# Altium PCB plp-cd_3a.PcbDoc
Units mm, origin at the board's own origin, x right, y up, seen from the top; angles counter-clockwise.
Board outline 34 x 22 mm, 4 copper layers (Top Layer, Signal Layer 1, Signal Layer 2, Bottom Layer), stack 0.789 mm thick; 30 components, 27 nets, 124 pads, 46 vias.
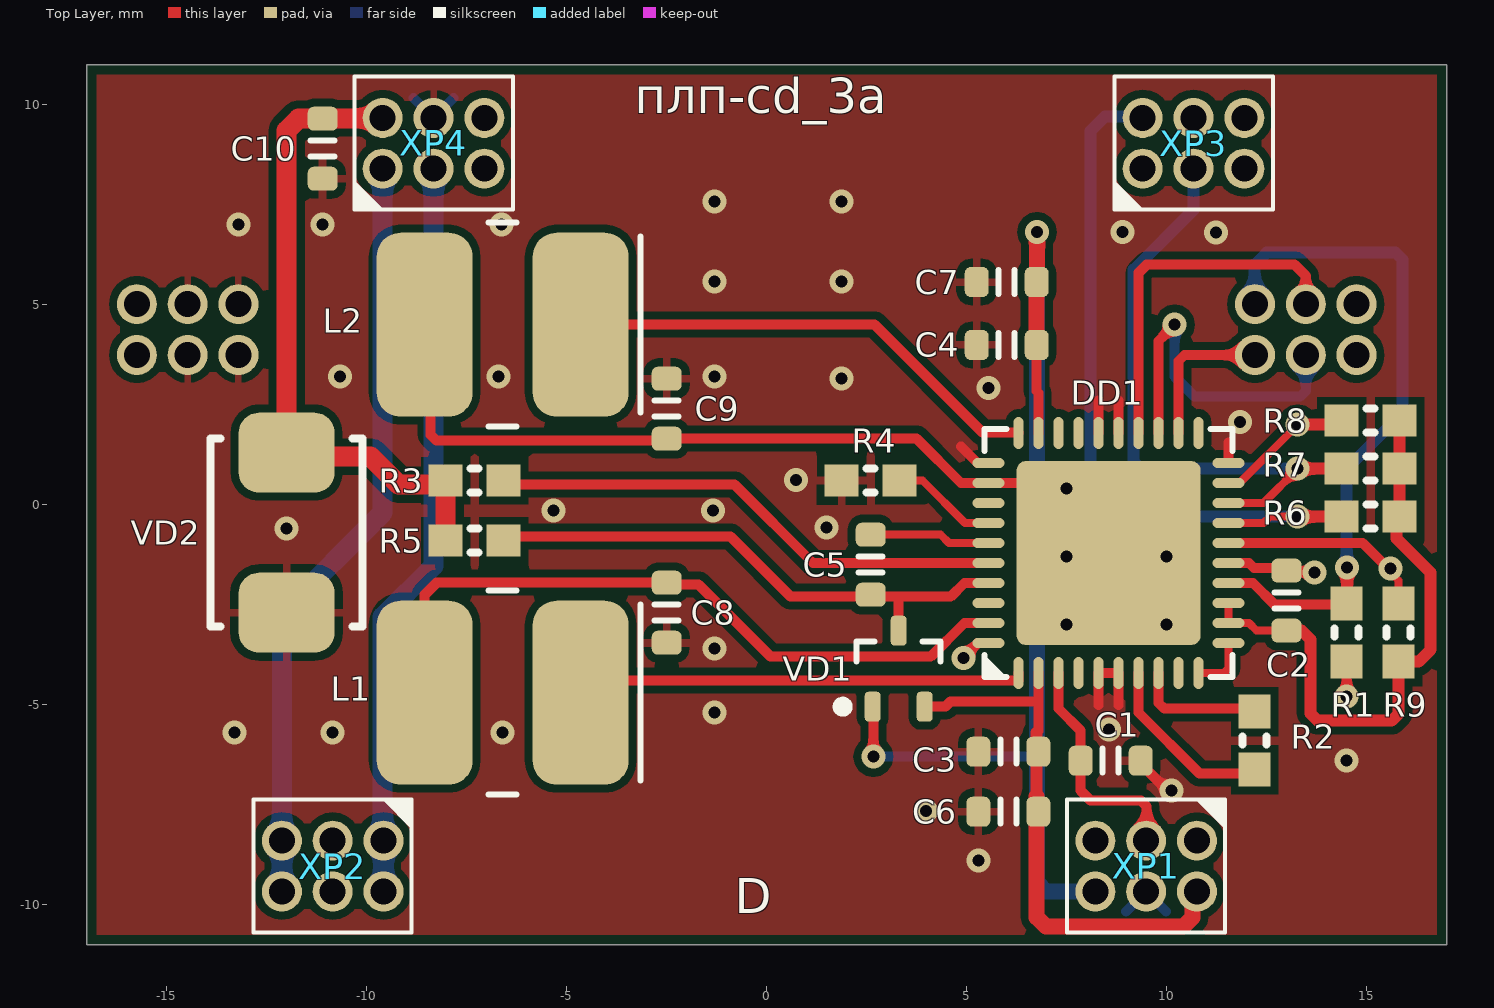
[diagram p0: Top Layer view]
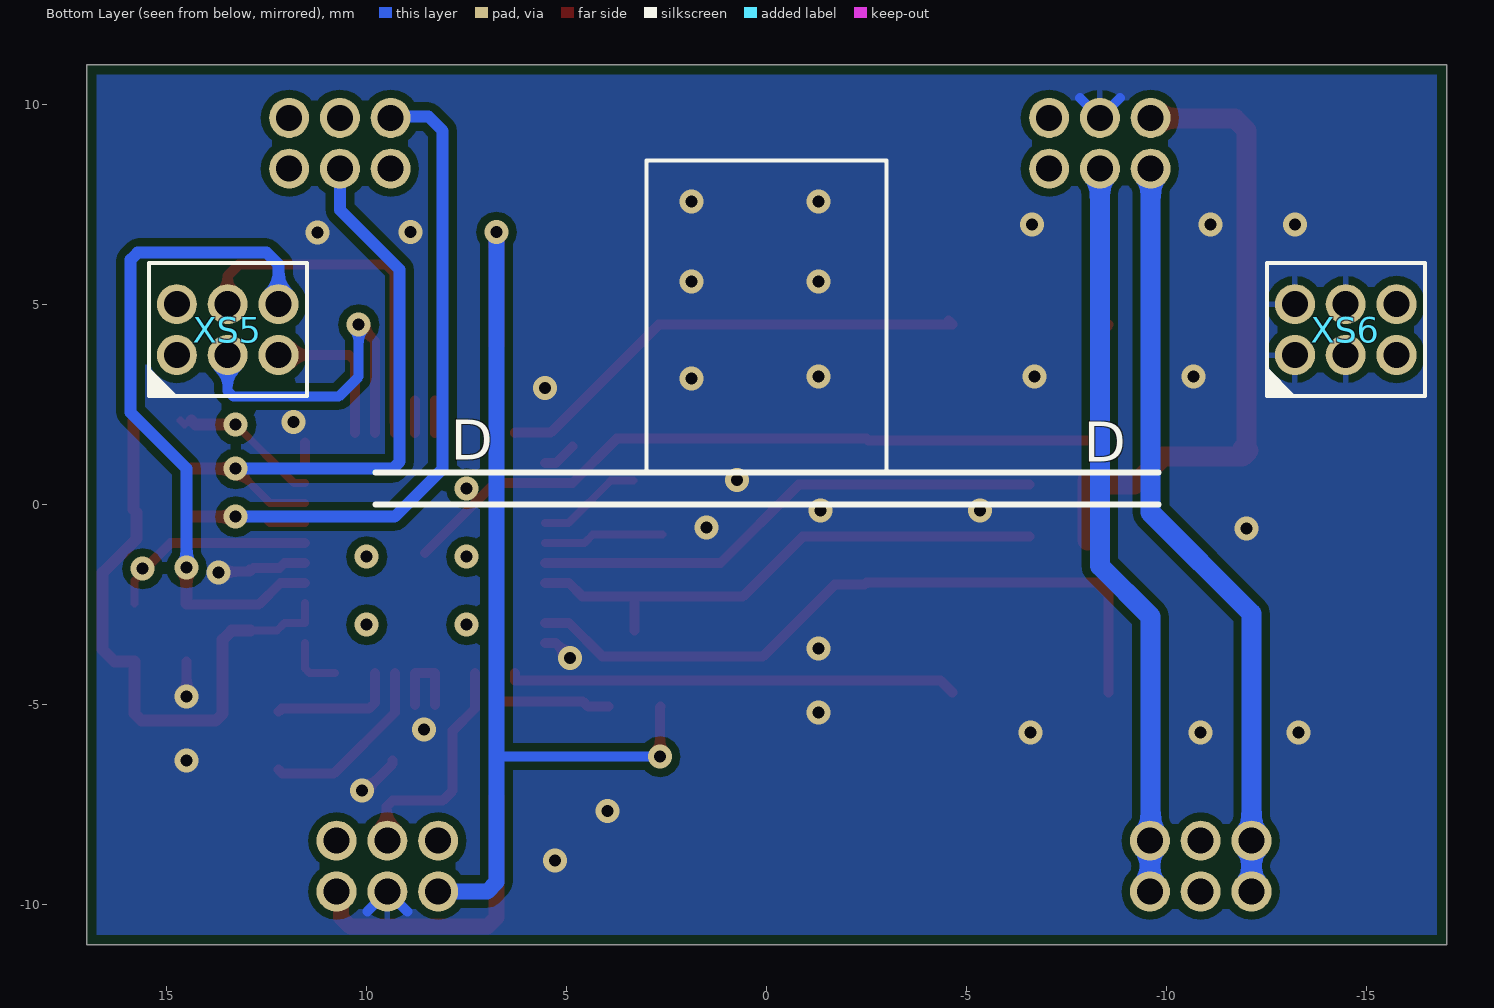
[diagram p1: Bottom Layer view, seen from below]
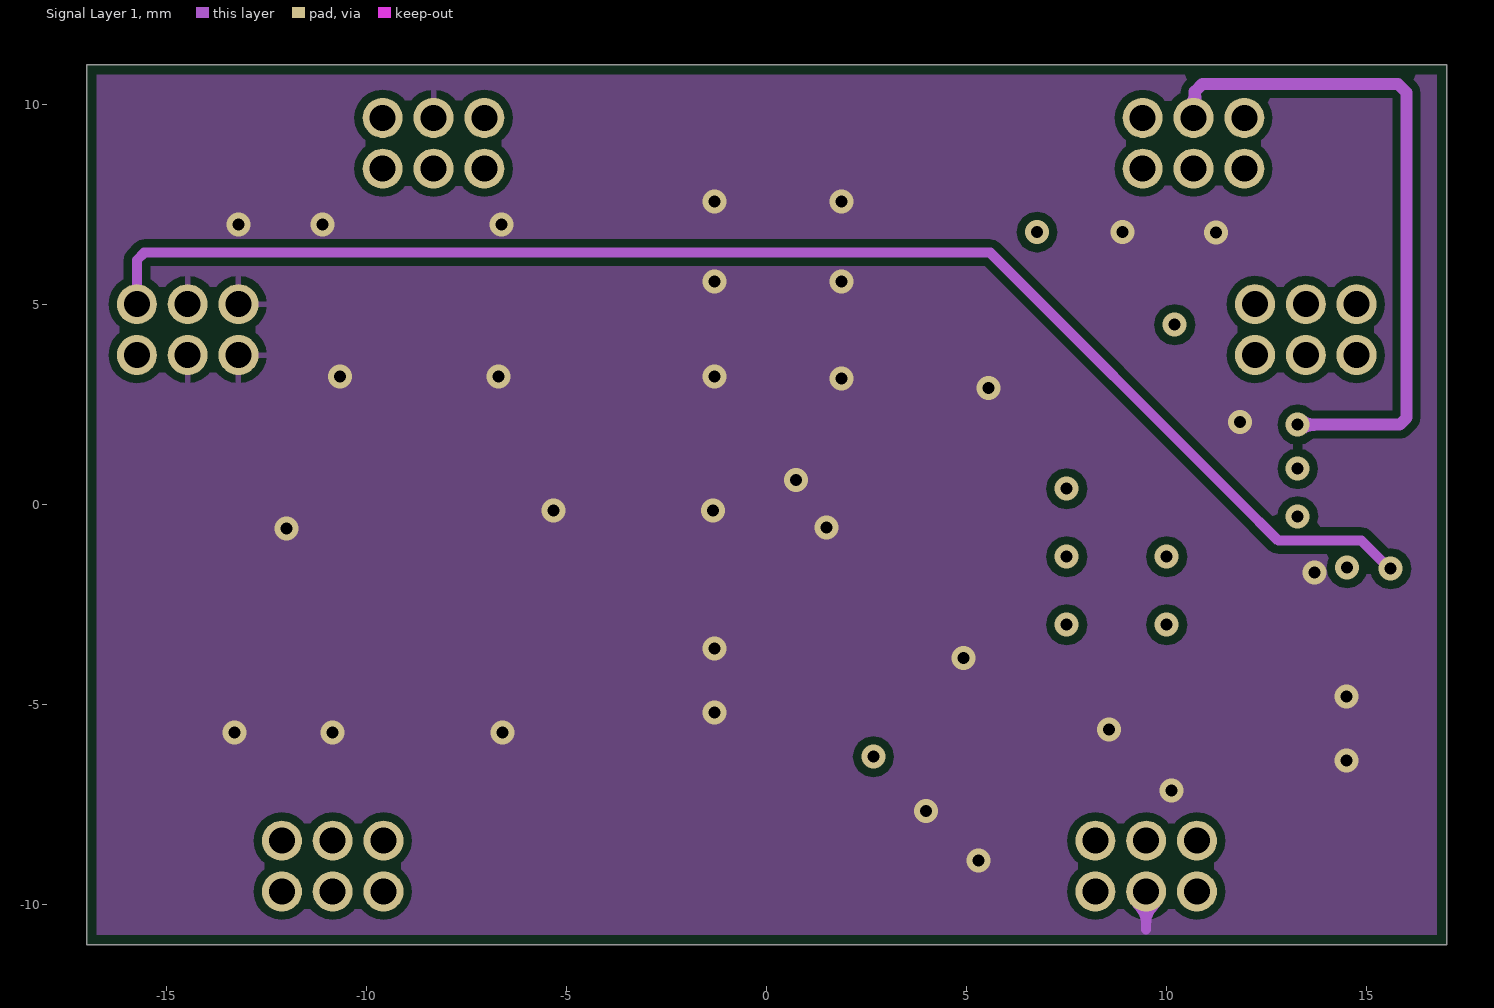
[diagram p2: Signal Layer 1]
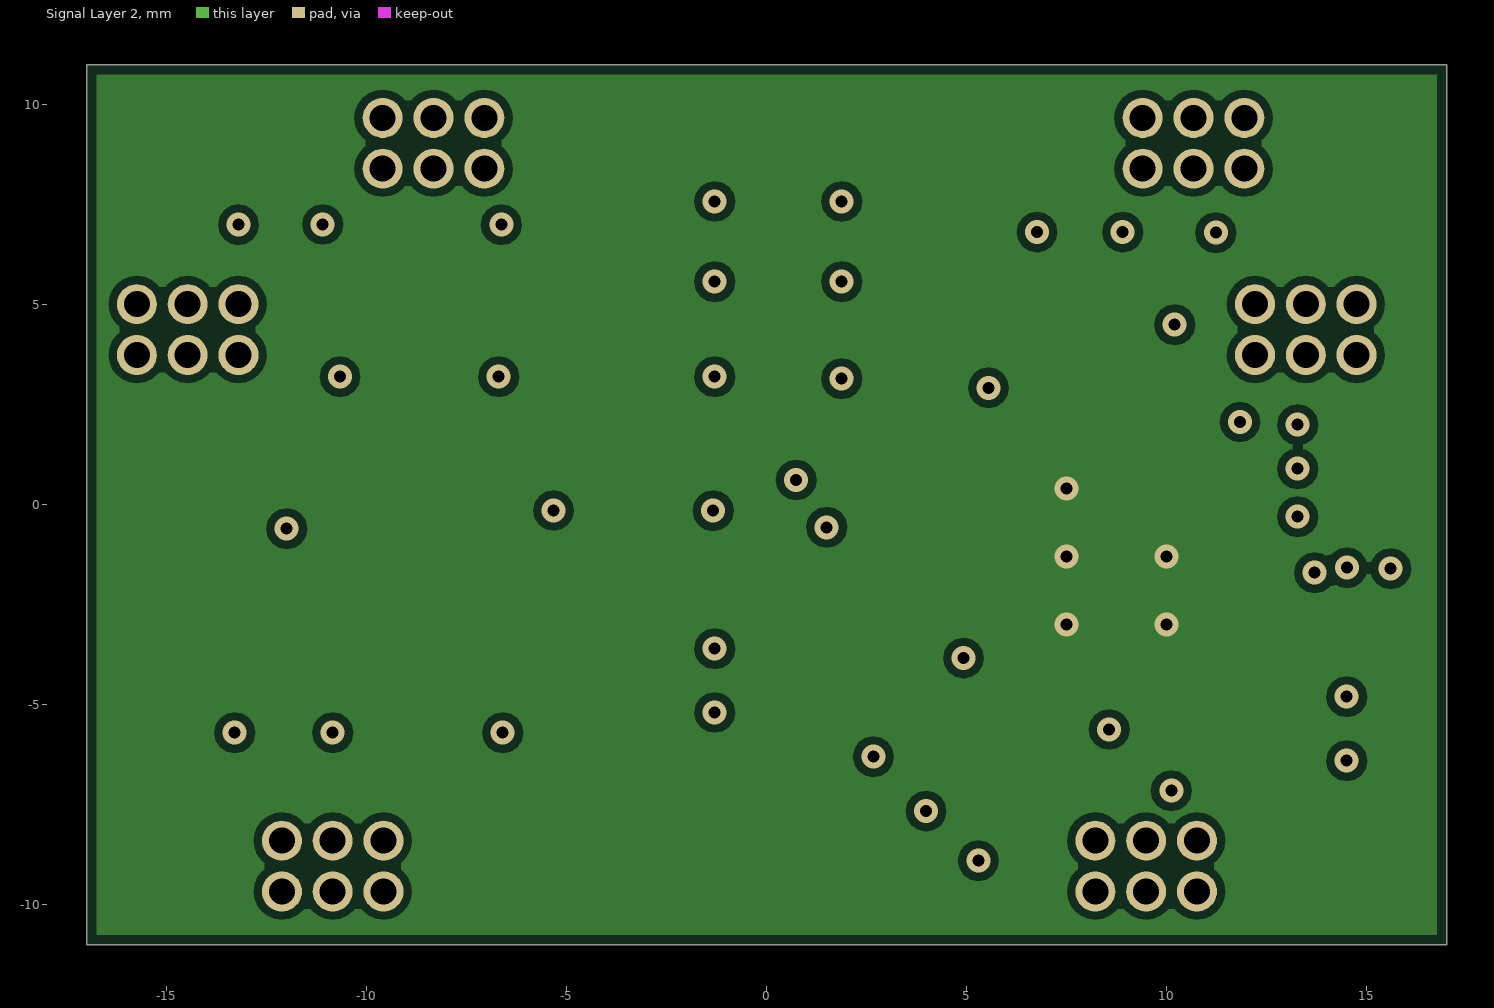
[diagram p3: Signal Layer 2]
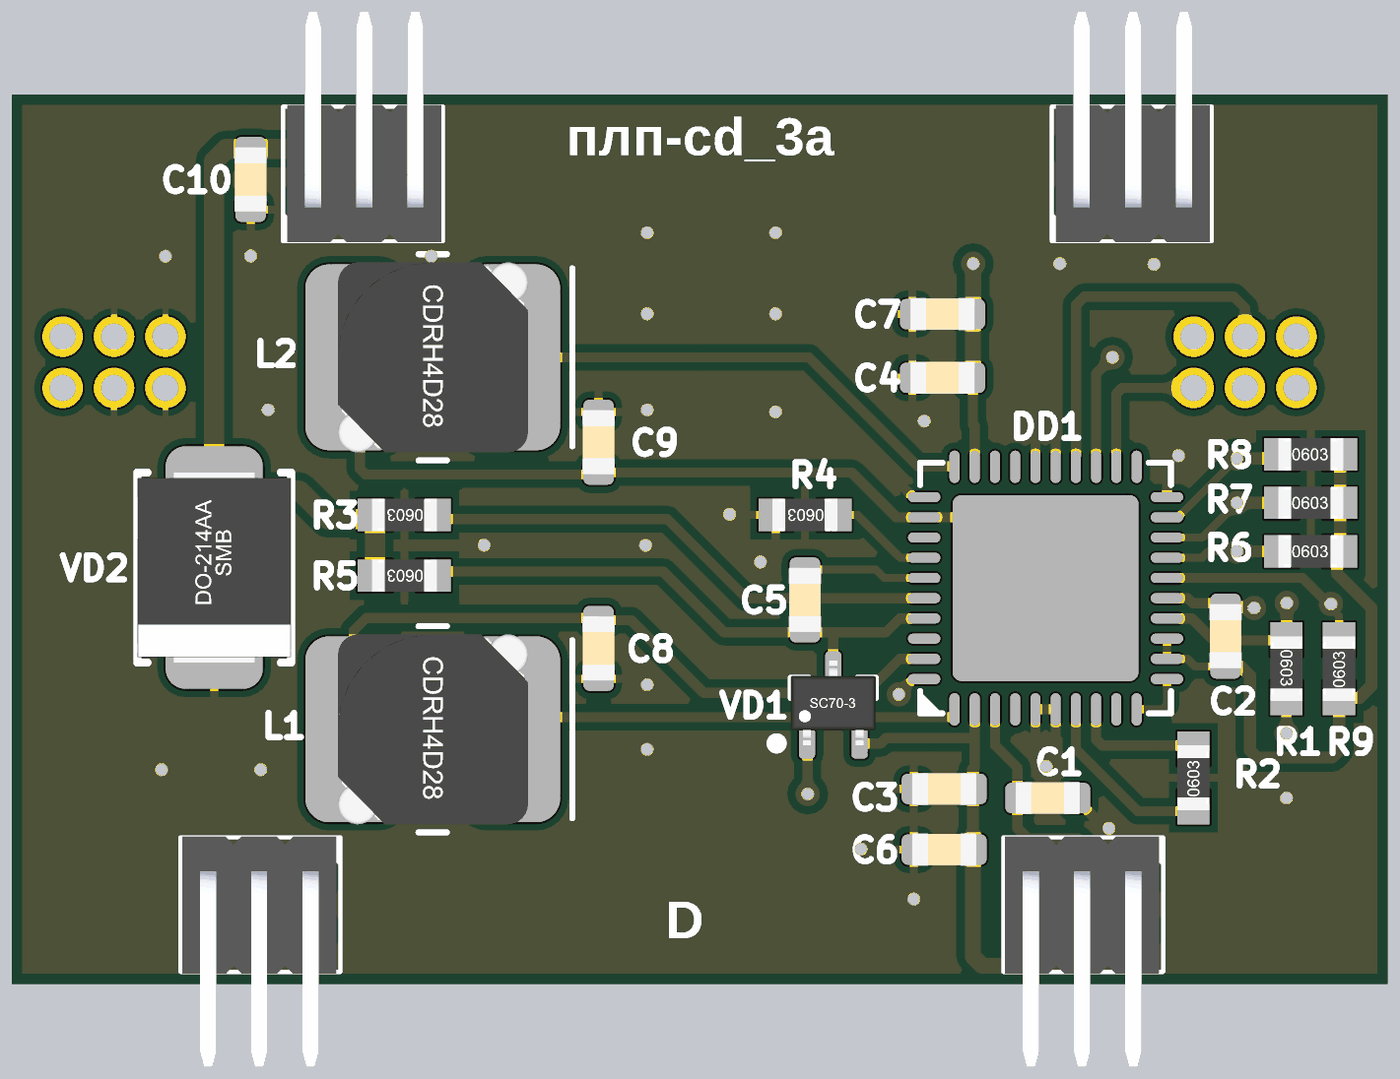
[diagram p4: 3D render of the assembled board from above, using the file's embedded part models]

## Layer stack, top to bottom
Top Solder: solder mask 0.0102, Solder Resist, Dk 3.5
Top Layer: signal copper 0.018
Dielectric1: prepreg 0.3, FR-4, Dk 4.8
Signal Layer 1: signal copper 0.036
Dielectric 3: core 0.254, Dk 4.2
Signal Layer 2: signal copper 0.036
Dielectric 2: prepreg 0.127, Dk 4.2
Bottom Layer: signal copper 0.018
Bottom Solder: solder mask 0.0102, Solder Resist, Dk 3.5

## Board outline
-17,-11 -17,11 17,11 17,-11

## Design rules (kind name [scope] priority, off if disabled: settings)
AcuteAngle [All] p1: minimum=3.50000000000000E+0001 checktracksonly=FALSE
BoardOutlineClearance "BoardOutlineClearance 1" [All] p1: gap=0.25 ignorepadtopadclearanceinfootprint=FALSE except(0: Arc-SplitContinuation Track-SplitContinuation SMDPad-SplitContinuation THPad-SplitContinuation Via-SplitContinuation Fill-SplitContinuation Poly-SplitContinuation Region-SplitContinuation Text-SplitContinuation) // Milling
Clearance "Clearance-1 1/2 Oz" [All] p1: gap=0.125 ignorepadtopadclearanceinfootprint=FALSE except(0.2: Arc-Fill Arc-Poly Track-Fill Track-Poly SMDPad-SMDPad SMDPad-Fill SMDPad-Poly THPad-Fill THPad-Poly Via-Fill Via-Poly Fill-Fill Fill-Poly Poly-Poly Poly-Region Poly-Text; 0.25: Arc-Hole Track-Hole SMDPad-Hole THPad-Hole Via-Hole Fill-Hole Poly-Hole Region-Hole Text-Hole) // Standart
DiffPairsRouting "DiffPairsRouting 1 Oz" [All] p1: maxlimit=0.254 minlimit=0.2 mostfreqgap=0.254 toplayer_minwidth=0.2 toplayer_maxwidth=0.381 toplayer_prefwidth=0.381 midlayer1_minwidth=0.2 midlayer1_maxwidth=0.381 midlayer1_prefwidth=0.381 midlayer2_minwidth=0.2 midlayer2_maxwidth=0.381 midlayer2_prefwidth=0.381 bottomlayer_minwidth=0.2 bottomlayer_maxwidth=0.381 bottomlayer_prefwidth=0.381 maxuncoupledlength=12.7
DiffPairsRouting "DiffPairsRouting 1/2 Oz" [All] p2: maxlimit=0.254 minlimit=0.1 mostfreqgap=0.254 toplayer_minwidth=0.1 toplayer_maxwidth=0.381 toplayer_prefwidth=0.381 midlayer1_minwidth=0.1 midlayer1_maxwidth=0.381 midlayer1_prefwidth=0.381 midlayer2_minwidth=0.1 midlayer2_maxwidth=0.381 midlayer2_prefwidth=0.381 bottomlayer_minwidth=0.1 bottomlayer_maxwidth=0.381 bottomlayer_prefwidth=0.381 maxuncoupledlength=12.7
HoleSize "Minimum HoleSize" [IsPad] p1: absolutevalues=TRUE maxlimit=5.9 minlimit=0.6 maxpercent=80.000 minpercent=20.000
HoleSize "Minimum HoleSize VIA 1" [IsVia] p2: absolutevalues=TRUE maxlimit=5.9 minlimit=0.3 maxpercent=80.000 minpercent=20.000 // Standart
HoleSize "Minimum HoleSize VIA 2" [IsVia] p3: absolutevalues=TRUE maxlimit=5.9 minlimit=0.2 maxpercent=80.000 minpercent=20.000 // Advance
HoleToHoleClearance Hole2HoleClearance [All] p1: gap=0.25 allowstackedmicrovias=FALSE
MinimumAnnularRing "Minimum AR VIA Standart" [IsVia] p1: minimumring=0.15
MinimumAnnularRing "Minimum AR PAD Standart" [IsPAD] p2: minimumring=0.2
MinimumAnnularRing "Minimum AR VIA Advance" [IsVia] p3: minimumring=0.1
MinimumAnnularRing "Minimum AR PAD Advance" [IsPAD] p4: minimumring=0.15
MinimumSolderMaskSliver "SolderMask Bridge Standart" [All] p1: minsoldermaskwidth=0.15 // All Masks
MinimumSolderMaskSliver "SolderMask Bridge Advance" [All] p2: minsoldermaskwidth=0.1 // Mask LDI
PlaneClearance "PlaneClearance-1 1/2 Oz" [All] p1: clearance=0.2 // Standart
PlaneConnect "TermalConnect-1 1/2 Oz" [All] p1: planeconnectstyle=Relief reliefexpansion=0.2 reliefentries=4 reliefconductorwidth=0.2 reliefairgap=0.2 // Standart
PolygonConnect "PolygonConnect-1 1/2 Oz" [All] p1: thpad.connectstyle=Relief thpad.reliefconductorwidth=0.15 thpad.reliefentries=4 thpad.polygonreliefangle="90 Angle" thpad.airgapwidth=0.2 smdpad.connectstyle=Relief smdpad.reliefconductorwidth=0.2 smdpad.reliefentries=4 smdpad.polygonreliefangle="90 Angle" smdpad.airgapwidth=0.2 via.connectstyle=Direct via.reliefconductorwidth=0.254 via.reliefentries=4 via.polygonreliefangle="90 Angle" via.airgapwidth=0.254 // Standart
RoutingCorners [All] p1 off: cornerstyle=45-Degree minsetback=2.54 maxsetback=2.54
RoutingVias [All] p1: holewidth=0.3 width=0.6 viastyle="Through Hole" minholewidth=0.2 minwidth=0.4 maxholewidth=5.9 maxwidth=6.4
ShortCircuit [All] p1: allowed=TRUE
SilkToSilkClearance Silk2SilkClearance [All] p1 off: silktosilkclearance=0.15
SilkToSolderMaskClearance Silk2SolderMaskClearance [IsPad] p1 off: minsilkscreentomaskgap=0.15 clearancetoexposedcopper=TRUE
SolderMaskExpansion SolderMaskExpansion-1 [All] p1: expansion=0.05 istentingtop=FALSE // Standart
SolderMaskExpansion "SolderMaskExpansion LDI" [All] p2: expansion=0.025 istentingtop=FALSE // Advance
UnRoutedNet [All] p1: checkbadconnections=TRUE
Width "Width 1/2 Oz" [All] p1: maxlimit=10 minlimit=0.1 preferedwidth=0.125 checkconnectedcopper=TRUE
19 further rules are at their usual default settings.

## Components (designator, comment, footprint, x,y, rotation, side; value= is the part's Value field where it differs from the comment)
C1 "Capacitor Ceramic" CAPC_0603(1608)X080L 8.6,-6.4 r180 top value=0.1uF
C2 "Capacitor Ceramic" CAPC_0603(1608)X080L 12.994,-2.397 r270 top value=0.1uF
C3 "Capacitor Ceramic" CAPC_0603(1608)X080L 6.041,-6.175 r0 top value=4.7uF
C4 "Capacitor Ceramic" CAPC_0603(1608)X080L 6,3.994 r0 top value=4.7uF
C5 "Capacitor Ceramic" CAPC_0603(1608)X080L 2.6,-1.5 r270 top value=120pF
C6 "Capacitor Ceramic" CAPC_0603(1608)X080L 6.041,-7.675 r0 top value=0.1uF
C7 "Capacitor Ceramic" CAPC_0603(1608)X080L 6,5.568 r0 top value=0.1uF
C8 "Capacitor Ceramic" CAPC_0603(1608)X080L -2.5,-2.7 r90 top value=2.2uF
C9 "Capacitor Ceramic" CAPC_0603(1608)X080L -2.5,2.4 r270 top value=2.2uF
C10 "Capacitor Ceramic" CAPC_0603(1608)X080L -11.1,8.9 r90 top value=0.01uF
DD1 "AD5753AREZ" CP-40-15 8.546,-1.208 r90 top
L1 "CDRH4D28" CDRH4D28_INDP5050X28N -6.6,-4.7 r270 top
L2 "CDRH4D28" CDRH4D28_INDP5050X28N -6.6,4.5 r270 top
R1 "R0603L" RESC1608(0603)X04L 14.5,-3.2 r270 top value=100k
R2 "R0603L" RESC1608(0603)X04L 12.2,-5.9 r90 top value=13,7k
R3 "R0603L" RESC1608(0603)X04L -7.3,0.6 r180 top value=1k
R4 "R0603L" RESC1608(0603)X04L 2.6,0.6 r180 top value=1k
R5 "R0603L" RESC1608(0603)X04L -7.3,-0.9 r180 top value=10
R6 "R0603L" RESC1608(0603)X04L 15.1,-0.3 r0 top value=1k
R7 "R0603L" RESC1608(0603)X04L 15.1,0.9 r0 top value=1k
R8 "R0603L" RESC1608(0603)X04L 15.1,2.1 r0 top value=1k
R9 "R0603L" RESC1608(0603)X04L 15.8,-3.2 r90 top value=100k
VD1 "BAT54SW" SC-70 3.3,-4.1 r0 top
VD2 "Transil Bi" "SMB - UNI" -12,-0.7 r90 top
XP1 "PLLD-6R" "CON: PLL-6(2x3R1.27male)" 10.755,-8.4 r180 top locked
XP2 "PLLD-6R" "CON: PLL-6(2x3R1.27male)" -9.58,-8.4 r180 top locked
XP3 "PLLD-6R" "CON: PLL-6(2x3R1.27male)" 9.4,8.4 r0 top locked
XP4 "PLLD-6R" "CON: PLL-6(2x3R1.27male)" -9.6,8.4 r0 top locked
XS5 "PLLD-6" "CON: PLL-6(2x3R1.27female)" 15.5,2.7 r180 bottom locked
XS6 "PLLD-6" "CON: PLL-6(2x3R1.27female)" -12.452,2.7 r180 bottom locked

## Footprints (in the part's own frame and the unit in brackets; to place one, negate y for a bottom-side part, rotate by r counter-clockwise, add the part's x,y. Pads: shape width x height; smd on the part's side, far side on the other; paste and mask are expansions set on the pad)
CAPC_0603(1608)X080L [mm] "Chip Capacitor, 2-Leads, Body 1,6x0,8mm, IPC High Density"
  rrect50% 0.6x0.75 smd: 1(-0.75,0) 2(0.75,0)
  silkscreen extent -0.2,-0.3 0.2,0.3, body extent -0.8,-0.4 0.8,0.4, height 0.8
CDRH4D28_INDP5050X28N [mm] "Precision Wire Wound Inductor, 2-Leads, Body 5,0x5,0mm, IPC Medium Density"
  rrect50% 4.6x2.4 smd: 1(0,1.95) 2(0,-1.95)
  silkscreen extent -2.55,-0.35 2.55,3.45, body extent -2.35,-2.35 2.35,2.37, height 2.8
"CON: PLL-6(2x3R1.27female)" [mm]
  round 1 hole 0.65: 1(0.754,1.042) 2(0.754,2.312) 3(2.024,1.042) 4(2.024,2.312) 5(3.294,1.042) 6(3.294,2.312)
  silkscreen extent 0.05,0.02 4.01,3.34
"CON: PLL-6(2x3R1.27male)" [mm]
  round 1 hole 0.65: 1(0,0) 2(0,1.27) 3(1.27,0) 4(1.27,1.27) 5(2.54,0) 6(2.54,1.27)
  silkscreen extent -0.7,-1.02 3.25,2.3, body extent -0.6,-1.05 3.21,4.65, height 4.39
CP-40-15 [mm] "QFN, 40-Leads, Body 6,2x6,2mm (max), Pitch 0,50mm, IPC Medium Density"
  oval 0.8x0.25 smd: 1(-3,2.25) 2(-3,1.75) 3(-3,1.25) 4(-3,0.75) 5(-3,0.25) 6(-3,-0.25) 7(-3,-0.75) 8(-3,-1.25) 9(-3,-1.75) 10(-3,-2.25) 21(3,-2.25) 22(3,-1.75) 23(3,-1.25) 24(3,-0.75) 25(3,-0.25) 26(3,0.25) 27(3,0.75) 28(3,1.25) 29(3,1.75) 30(3,2.25)
  oval 0.25x0.8 smd: 11(-2.25,-3) 12(-1.75,-3) 13(-1.25,-3) 14(-0.75,-3) 15(-0.25,-3) 16(0.25,-3) 17(0.75,-3) 18(1.25,-3) 19(1.75,-3) 20(2.25,-3) 31(2.25,3) 32(1.75,3) 33(1.25,3) 34(0.75,3) 35(0.25,3) 36(-0.25,3) 37(-0.75,3) 38(-1.25,3) 39(-1.75,3) 40(-2.25,3)
  rrect10% 4.6x4.6 smd: 41(0,0)
  silkscreen extent -3.1,-3.1 3.1,3.1, body extent -3.08,-3.08 3.08,3.08, height 1
RESC1608(0603)X04L [mm] "Chip Resistor, 2-Leads, Body 1,6x0,8mm, IPC High Density"
  rect 0.85x0.8 smd: 1(-0.725,0) 2(0.725,0)
  silkscreen extent -0.1,-0.3 0.1,0.3, body extent -0.8,-0.4 0.8,0.4, height 0.45
SC-70 [mm] "SC-70, 3-Leads, Body 2,1x1,4mm (max), Pitch 0,65mm, IPC High Density"
  rrect50% 0.4x0.75 smd: 1(-0.65,-0.95) 2(0.65,-0.95) 3(0,0.95)
  silkscreen extent -1.52,-1.07 1.05,0.67, body extent -1.05,-1 1.05,1.1, height 1.1
"SMB - UNI" [mm] "Molded Diode, 2-Leads, Body 4,4x3,5mm, IPC Medium Density"
  rrect50% 2x2.4 smd: 1(-2,0) 2(2,0)
  silkscreen extent -2.35,-1.9 2.35,1.9, body extent -2.35,-1.9 2.35,1.9, height 2.32

## Part data
C1 C2 C3 C4 C5 C6 C7 C10: "Конденсатор", Case=0603, Manufacturer=Murata, Rated DC Voltage=50V, ReplacementPart1Manufacturer=TDK, ReplacementPart2Manufacturer="Taiyo Yuden", Temperature Range="-55 to +125°C", Tolerance=±10%, ComponentLink1Description="Global Data", ComponentLink1URL=http://www.murata.com/products/capacitor/tech_data/index.html, ComponentLink2Description="Part Data Sheet", ComponentLink3Description="Replacement Data Sheet", ComponentLink4Description="Replacement 2 Data Sheet", ESR="* mOhm", OrderCode="0603 - 4,7мкФ ±10% - 10В - X5R", TC Code=X5R
C8 C9: "Конденсатор", Case=0603, Manufacturer=Murata, Rated DC Voltage=10V, ReplacementPart1Manufacturer=TDK, ReplacementPart2Manufacturer="Taiyo Yuden", Temperature Range="-55 to +125°C", Tolerance=±10%, ComponentLink1Description="Global Data", ComponentLink1URL=http://www.murata.com/products/capacitor/tech_data/index.html, ComponentLink2Description="Part Data Sheet", ComponentLink3Description="Replacement Data Sheet", ComponentLink4Description="Replacement 2 Data Sheet", ESR="* mOhm", OrderCode="0603 - 4,7мкФ ±10% - 10В - X5R", TC Code=X5R
DD1: library part AD5753, "Микросхема", Manufacturer="Analog Devices", PartNumber=AD5753AREZ
R1 R2 R3 R4 R5 R6 R7 R8 R9: "Резистор", Case=0603, Manufacturer=Bourns, Max Rated DC Voltage="100 В", Power="1/10 Вт", Rated DC Voltage="50 В", Resistance Code="0603 {Value} Ом ±1 %", Temperature Range="-55 to +125°C", Tolerance="±1 %", ComponentLink1Description="Data Sheet", ComponentLink1URL=http://smd.ru/files/upload/1207/ru/chip-resis.pdf, ComponentLink2Description="Specific Res Only", ComponentLink3Description="Replacement Data Sheet", ComponentLink4Description="Replacement 2 Data Sheet", Rated T="-55 °C to +125 °C", TKR="±100 ppm"
VD1: "Сборка диодная", Manufacturer=NXP, Package=SC-70, ReplacementPart1Manufacturer="ON Semiconductor", ReplacementPart1PartNumber=BAT54SWT1G, ReplacementPart2Manufacturer=Infineon, ReplacementPart2PartNumber=BAT54-04W, ComponentLink1Description=DataSheet, ComponentLink1URL=http://www.nxp.com/documents/data_sheet/BAT54W.pdf, ComponentLink2Description=Replacement1DataSheet, ComponentLink2URL=http://www.onsemi.com/pub_link/Collateral/BAT54SWT1-D.PDF, ComponentLink3Description=Replacement2DataSheet, ComponentLink3URL=http://www.infineon.com/dgdl/bat54series.pdf?folderId=db3a30431400ef68011425f1ca2505e3&fileId=db3a304314dca3890115190b74210ea6, PartNumber=BAT54SW, ReplacementPart1TopMarking=B8*, ReplacementPart2TopMarking=TS, TopMarking=44
VD2: "TVS Диод", Manufacturer="ST Microelectronics", ComponentLink1Descriprion="Data Sheet", ComponentLink2Description="Replacement 1 Data Sheet", ComponentLink3Description="Replacement 2 Data Sheet"
XP1 XP2 XP3 XP4: library part PLLD-6R(Male), "Step 1.27 R"
XS5 XS6: library part PLLD-6(Female), "Step 1.27"

## Via types
v1: diameter 0.6, hole 0.3, Top Layer to Bottom Layer, tented both sides, 46 vias

## Nets (pads, with @x,y where several pads share a name; then routed paths per layer and width w, separated by ;. In a path a pad name is that pad's centre, name@x,y a point inside that pad or via, vN(x,y) a via of type N, cw(c..) or ccw(c..) an arc to the next point about the centre after c; other vN are vias at no path point)
+3.3: C2.2 DD1.12 DD1.13 R6.2 R7.2 R8.2 R9.1 | length 15.3
  Top Layer w0.2: DD1.13 DD1.12 12.057,-2.958 12.249,-3.15 C2.2@12.9,-3.15
  Top Layer w0.3: C2.2@12.9,-3.15 13.375,-3.15 13.6,-3.375 13.6,-5.224 13.776,-5.4 15.624,-5.4 15.8,-5.224 R9.1 16.3,-3.925 16.6,-3.625 16.6,-1.7 15.75,-0.85 15.75,-0.2 15.825,-0.125 R7.2 R8.2
+5: C1.2 DD1.3 XP1.3 | length 5.8
  Top Layer w0.25: DD1.3 7.296,-5.096 7.85,-5.65 C1.2 7.85,-7.15 8.1,-7.4 9.354,-7.4 9.5,-7.546 9.5,-8.385 XP1.3
+15: C3.2 C6.2 DD1.2 VD1.2 XP1.2 | length 13.8
  Top Layer w0.25: VD1.2 4.466,-5.05 4.6,-4.916 6.782,-4.916 6.796,-4.931 ; 6.75,-5.7 6.796,-5.654 6.796,-4.931 ; DD1.2 6.796,-4.931
  Top Layer w0.3: C6.2@6.75,-7.3 6.75,-6.175 6.75,-5.7
  Top Layer w0.4: C6.2@6.75,-7.3 6.75,-7.675 6.75,-10.316 6.984,-10.55 10.411,-10.55 10.645,-10.316 10.645,-9.78 XP1.2
+Uп: XP2.5 XP2.6 XP4.1 | length 19.1
  Bottom Layer w0.5: XP2.6 XP2.5 -12.12,-2.72 -9.6,-0.2 XP4.1
-15: C4.2 C7.2 DD1.29 VD1.1 XP1.6 | length 28.2
  Top Layer w0.25: VD1.1 2.667,-5.067 v1(2.667,-6.3) ; C4.2 6.75,2.842 6.796,2.796 DD1.29
  Top Layer w0.4: C4.2 C7.2 6.758,5.576 v1(6.758,6.814)
  Bottom Layer w0.25: v1(2.667,-6.3) 6.8,-6.3
  Bottom Layer w0.4: 6.758,-6.3 6.758,-9.436 6.992,-9.67 XP1.6 ; 6.758,-6.258 v1(6.758,6.814)
-Uп: XP2.1 XP2.2 XP4.3 | length 18.6
  Bottom Layer w0.5: XP2.2 XP2.1 -9.6,-8.38 -9.6,-2.8 -8.33,-1.53 XP4.3
CS1: DD1.24 XS5.4 | length 9.1
  Top Layer w0.25: DD1.24 9.296,2.067 9.3,2.071 9.3,5.8 9.5,6 13.2,6 13.476,5.724 XS5.4
GND: C1.1 C2.1 C3.1 C4.1 C6.1 C7.1 C8.1 C9.1 C10.1 DD1.5 DD1.6 DD1.15 DD1.20 DD1.25 DD1.26 DD1.31 DD1.40 R1.2 R4.2 VD2.1 XP1.4 XP4.4 XS6.1 XS6.2 XS6.3 XS6.4 | length 14.1
  Top Layer w0.25: 4.858,1.456 5.271,1.042 DD1.31 ; v1(4.921,-3.835) 4.921,-3.808 5.271,-3.458 DD1.40 ; 8.296,-5.004 DD1.5 DD1.6 8.796,-5.004 ; DD1.26 8.296,2.604 ; DD1.25 8.796,2.604 ; C1.1 9.35,-6.475 10.025,-7.15 v1@10.171,-7.15 ; DD1.15 12.057,-1.458 12.182,-1.583 12.833,-1.583 C2.1@12.9,-1.65 ; DD1.20 11.546,1.554 ; C2.1@12.926,-1.624 C2.1@12.9,-1.65 ; v1@13.624,-1.624 v1@13.673,-1.673 ; v1(13.7,-1.7) v1@13.673,-1.673 ; v1(14.5,-4.8) R1.2 ; C2.1@12.9,-1.65 12.923,-1.673 v1@13.673,-1.673
  Signal Layer 1 w0.25: 9.485,-10.625 XP1.4
  Bottom Layer w0.25: -8.829,10.169 XP4.4 -7.831,10.169 ; 8.986,-10.169 XP1.4 9.984,-10.169
  other v1: 5.291,-8.899 3.984,-7.661 10.114,-7.15 14.5,-6.4 -13.3,-5.7 -10.85,-5.7 -6.6,-5.7 8.562,-5.62 -1.3,-5.196 -1.3,-3.6 -12,-0.6 1.5,-0.564 -5.33,-0.146 -1.339,-0.15 0.737,0.617 11.832,2.067 5.546,2.923 1.875,3.15 -10.667,3.2 -6.7,3.2 -1.3,3.2 -1.3,5.576 1.875,5.576 11.226,6.8 8.9,6.814 -13.206,7 -6.635,7 -11.1,7.007 -1.3,7.582 1.875,7.582
GPIO0: DD1.17 R6.1 XP3.2 | length 18.5
  Top Layer w0.2: DD1.17 12.417,-0.458 12.575,-0.3 v1(13.275,-0.3)
  Top Layer w0.3: v1(13.275,-0.3) R6.1
  Bottom Layer w0.3: XP3.2 9.37,9.7 8.451,9.7 8.1,9.349 8.1,0.9 9.3,-0.3 v1(13.275,-0.3)
GPIO1: DD1.18 R7.1 XP3.3 | length 15.4
  Top Layer w0.2: DD1.18 12.417,0.042 v1(13.275,0.9) ; v1@13.1,0.9 v1@13.2,0.9
  Top Layer w0.3: v1(13.275,0.9) R7.1
  Bottom Layer w0.3: XP3.3@10.6,8.33 XP3.3 10.67,7.37 9.176,5.876 9.176,1.076 9.351,0.9 v1@13.2,0.9
GPIO2: DD1.19 R8.1 XP3.4 | length 20.7
  Top Layer w0.2: DD1.19 11.819,0.542 13.275,1.998 v1(13.275,2) ; R8.1@14.55,2 R8.1@14.65,2.1
  Top Layer w0.3: v1(13.275,2) 14.275,2 R8.1
  Signal Layer 1 w0.3: XP3.4 10.7,9.7 10.7,10.324 10.896,10.52 15.78,10.52 16,10.3 16,2.176 15.824,2 v1(13.275,2)
MISO: DD1.14 R1.1 XS5.6 | length 17.3
  Top Layer w0.25: DD1.14 12.158,-1.958 12.7,-2.5 14.475,-2.5 R1.1
  Top Layer w0.3: R1.1 14.508,-2.467 v1(14.508,-1.575)
  Bottom Layer w0.3: XS5.6 12.2,5.019 12.2,6 12.5,6.3 15.724,6.3 15.9,6.124 15.9,2.3 14.5,0.9 14.5,-1.567 v1(14.508,-1.575)
MOSI: DD1.23 XS5.3 | length 8.6
  Top Layer w0.25: DD1.23 9.796,4.096 v1(10.2,4.5)
  Bottom Layer w0.25: v1(10.2,4.5) 10.2,3.2 10.7,2.7 13.33,2.7 13.476,2.846 XS5.3
NetC5_1: C5.1 DD1.35 | length 3
  Top Layer w0.2: C5.1 4.35,-0.75 4.558,-0.958 DD1.35
NetC5_2: C5.2 DD1.37 R5.1 VD1.3 | length 13.7
  Top Layer w0.25: R5.1@-6.575,-0.8 -0.9,-0.8 0.6,-2.3 3.3,-2.3 ; VD1.3 3.3,-2.3 ; DD1.37 4.942,-1.958 4.6,-2.3 3.3,-2.3
NetC8_2: C8.2 DD1.39 L1.2 | length 17.8
  Top Layer w0.25: L1.2 -8.55,-2.25 -8.25,-1.95 C8.2 -2.45,-2 -1.7,-2 0.1,-3.8 4.1,-3.8 4.942,-2.958 DD1.39
NetC9_2: C9.2 DD1.32 DD1.41 L2.2 | length 21
  Top Layer w0.25: L2.2 -8.4,4.35 -8.4,1.746 -8.254,1.6 -2.55,1.6 C9.2 3.75,1.65 4.858,0.542 DD1.32 6.796,0.542 DD1.41
  other v1: 7.5,-3 10,-3 7.5,-1.3 10,-1.3 7.5,0.4
NetDD1_1: DD1.1 L1.1 | length 11.3
  Top Layer w0.25: L1.1 -4.35,-4.4 6.296,-4.4 DD1.1
NetDD1_7: DD1.7 R2.1 | length 4.6
  Top Layer w0.25: DD1.7 9.296,-5.196 10.825,-6.725 12.1,-6.725 R2.1
NetDD1_8: DD1.8 R2.2 | length 3.2
  Top Layer w0.25: DD1.8 9.796,-4.954 9.943,-5.1 12.125,-5.1 R2.2
NetDD1_10: DD1.10 DD1.11 | length 1.4
  Top Layer w0.2: DD1.10 11.429,-4.208 11.546,-4.091 DD1.11
NetDD1_30: DD1.30 L2.1 | length 12.2
  Top Layer w0.25: L2.1@-4.55,4.6 L2.1 2.7,4.5 5.4,1.8 6.289,1.8 DD1.30
NetDD1_34: DD1.34 R4.1 | length 2.7
  Top Layer w0.2: R4.1 3.9,0.6 4.958,-0.458 DD1.34
NetDD1_36: DD1.36 R3.1 | length 12.9
  Top Layer w0.25: R3.1@-6.575,0.5 -0.8,0.5 1.158,-1.458 DD1.36
RST: DD1.16 R9.2 XS6.6 | length 41.1
  Top Layer w0.2: v1(15.6,-1.6) 15.6,-1.658 15.6,-1.7 15.8,-1.9 R9.2
  Top Layer w0.25: DD1.16 14.9,-0.958 v1@15.6,-1.658
  Signal Layer 1 w0.25: XS6.6 -15.746,6.117 -15.563,6.3 5.589,6.3 11.795,0.094 12.789,-0.9 14.869,-0.9 15.569,-1.6 v1(15.6,-1.6)
SCK: DD1.22 XS5.5 | length 3.8
  Top Layer w0.25: DD1.22 10.296,3.596 10.443,3.742 XS5.5
VIOUT: C10.2 R3.2 R5.2 VD2.2 XP4.2 | length 16.6
  Top Layer w0.5: VD2.2@-12.05,1.35 VD2.2 ; VD2.2@-11.9,1.4 VD2.2 ; XP4.2 -9.61,9.66 -11.09,9.66 C10.2 -11.707,9.65 -12,9.357 VD2.2 ; R5.2 R3.2@-8.025,0.5 ; R3.2 R3.2@-8.025,0.5 ; VD2.2 -11.9,1.2 -9.9,1.2 -9.2,0.5 R3.2@-8.025,0.5
pads on no net: DD1.4 DD1.9 DD1.21 DD1.27 DD1.28 DD1.33 DD1.38 XP1.1 XP1.5 XP2.3 XP2.4 XP3.1 XP3.5 XP3.6 XP4.5 XP4.6 XS5.1 XS5.2 XS6.5

## Polygon pours and split planes (outlines as drawn)
NetC9_2 on Signal Layer 2 "NONET_L02_P-001" (solid, pour order 0): -17,11 -17,-11 17,-11 17,11
GND on Top Layer "NONET_L02_P-001" (solid, pour order 1): -17,11 17,11 17,-11 -17,-11
GND on Signal Layer 1 "NONET_L02_P-001" (solid, pour order 2): -17,11 -17,-11 17,-11 17,11
GND on Bottom Layer "NONET_L02_P-001" (solid, pour order 3): -17,11 -17,-11 17,-11 17,11

## Silkscreen, mask and mechanical layers (free items; w line width, h text height)
Top Overlay:
  text "плп-cd_3a" at -3.3,9.5 h1.5
  text "D" at -0.8,-10.5 h1.5
Bottom Overlay:
  lines w0.1: -3,0.825 -3,8.6 3,8.6 3,0.825 2.975,0.825
  lines w0.15: -9.8,0 9.775,0 ; -9.8,0.8 9.775,0.8
  text "D" at 7.9,1.125 h1
  text "D" at -7.925,1.075 h1
Mechanical 3:
  lines w0.1: -3,-10.975 -3,0.025 ; 3,-11 3,0 ; -13,0 13,0 13,0.8 -13,0.8 -13,0 ; -5,0.8 5.025,0.8 5.025,10.975 -5,10.975 -5,0.8
Mechanical 4:
  lines w0.1: -17,-11 -17,-9 -17,9 -17,11 -11,11 11,11 17,11 17,9 17,-9 17,-11 11,-11 -11,-11 -17,-11